# Altium PCB MeasureMent.PcbDoc
Units mm, origin at the board's own origin, x right, y up, seen from the top; angles counter-clockwise.
Board outline 22.86 x 17.02 mm, 2 copper layers (Top Layer, Bottom Layer); 3 components, 6 nets, 25 pads, 3 vias.
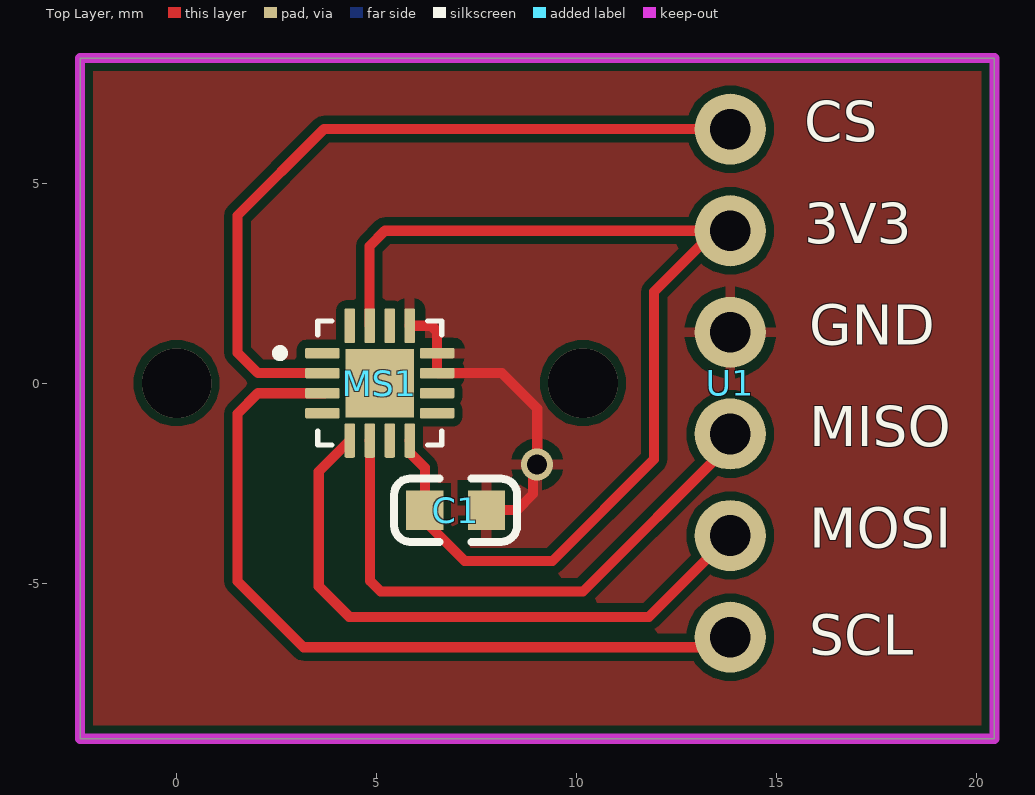
[diagram p0: Top Layer view]
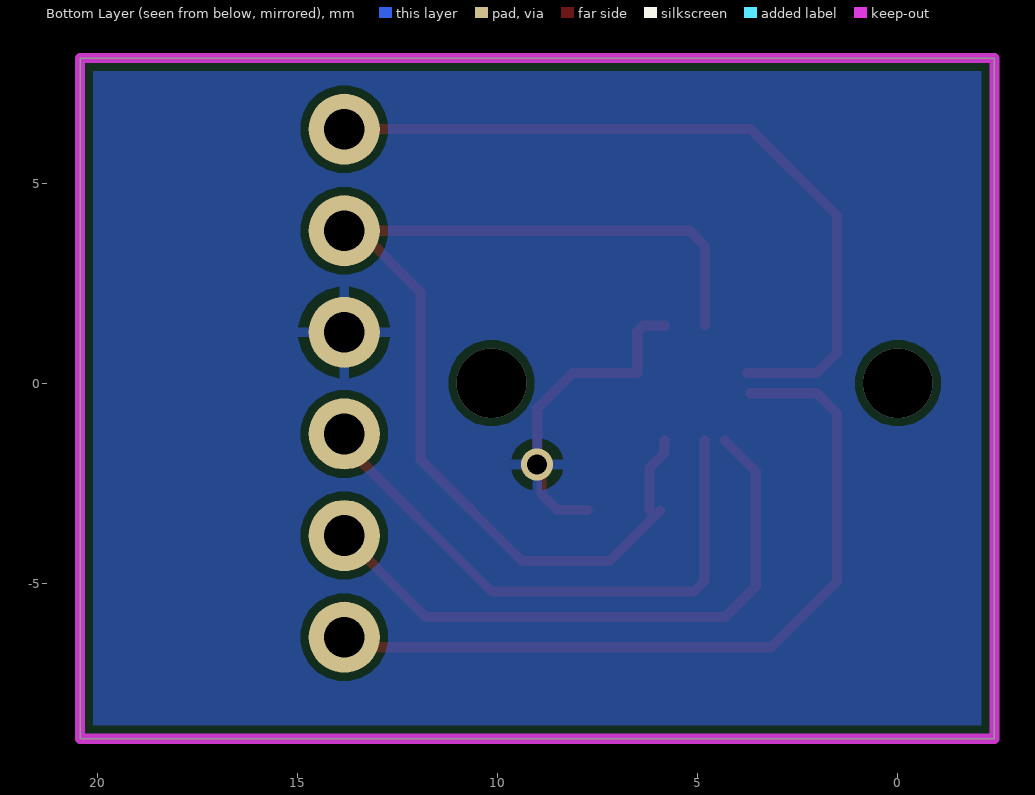
[diagram p1: Bottom Layer view, seen from below]

## Layer stack, top to bottom
Top Solder: solder mask 0.0102, Solder Resist, Dk 3.5
Top Layer: signal copper 0.0356
Dielectric 1: dielectric 0.32, FR-4, Dk 4.8
Bottom Layer: signal copper 0.0356
Bottom Solder: solder mask 0.0102, Solder Resist, Dk 3.5

## Board outline
-2.413,-8.89 20.447,-8.89 20.447,8.128 -2.413,8.128

## Design rules (kind name [scope] priority, off if disabled: settings)
Clearance [All] p1: gap=0.2 ignorepadtopadclearanceinfootprint=FALSE
PolygonConnect [All] p1: connectstyle=Relief reliefconductorwidth=0.254 reliefentries=4 polygonreliefangle="90 Angle" airgapwidth=0.254
RoutingVias [All] p1: holewidth=0.711 width=1.27 viastyle="Through Hole" minholewidth=0.711 minwidth=1.27 maxholewidth=0.711 maxwidth=1.27
SolderMaskExpansion [All] p1: expansion=0.102 istentingtop=FALSE
Width [All] p1: maxlimit=0.254 minlimit=0.254 preferedwidth=0.254
30 further rules are at their usual default settings.

## Components (designator, comment, footprint, x,y, rotation, side; value= is the part's Value field where it differs from the comment)
C1 "0.1uF" 0603_C 6.977,-3.175 r180 top
MS1 "MLX90393SLW ABA 011 RE" VQFN-16_EP_3.0x3.0xo.5P 5.08,0 r0 top
U1 "CONNECTER" CONNECTOR 13.716,0 r0 top

## Footprints (in the part's own frame and the unit in brackets; to place one, negate y for a bottom-side part, rotate by r counter-clockwise, add the part's x,y. Pads: shape width x height; smd on the part's side, far side on the other; paste and mask are expansions set on the pad)
0603_C [mm]
  rect 0.93x0.98 smd: 1(-0.77,0) 2(0.77,0)
  silkscreen extent -1.53,-0.79 1.54,0.79, body extent -0.8,-0.4 0.8,0.4, height 0.3
CONNECTOR [mil]
  round 70 hole 40: 1(5,250) 2(5,150) 3(5,50) 4(5,-50) 5(5,-150) 6(5,-250)
VQFN-16_EP_3.0x3.0xo.5P [mm]
  rrect25% 0.86x0.26 smd: 1(-1.435,0.75) 2(-1.435,0.25) 3(-1.435,-0.25) 4(-1.435,-0.75) 9(1.435,-0.75) 10(1.435,-0.25) 11(1.435,0.25) 12(1.435,0.75)
  rrect25% 0.26x0.86 smd: 5(-0.75,-1.435) 6(-0.25,-1.435) 7(0.25,-1.435) 8(0.75,-1.435) 13(0.75,1.435) 14(0.25,1.435) 15(-0.25,1.435) 16(-0.75,1.435)
  rect 1.71x1.71 smd paste-2: 17(0,0)
  silkscreen extent -2.59,-1.55 1.55,1.55, body extent -1.55,-1.55 1.55,1.55, height 1

## Part data
C1: library part CAP_0.1uF, "capacitance"
MS1: "sensor"

## Via types
v1: diameter 1.74, hole 1.74, Top Layer to Bottom Layer, 2 vias
v2: diameter 0.8, hole 0.5, Top Layer to Bottom Layer, 1 vias

## Nets (pads, with @x,y where several pads share a name; then routed paths per layer and width w, separated by ;. In a path a pad name is that pad's centre, name@x,y a point inside that pad or via, vN(x,y) a via of type N, cw(c..) or ccw(c..) an arc to the next point about the centre after c; other vN are vias at no path point)
3V3: C1.2 MS1.8 MS1.15 U1.2 | length 27
  Top Layer w0.254: MS1.15@4.827,1.449 4.827,1.799 4.826,1.8 4.826,3.429 5.207,3.81 U1.2@13.462,3.81 ; MS1.8 5.833,-1.438 5.833,-1.738 6.207,-2.112 C1.2 ; C1.2@5.944,-3.183 7.206,-4.445 9.398,-4.445 11.938,-1.905 11.938,2.286 U1.2@13.462,3.81 ; U1.2 U1.2@13.462,3.81
CS: MS1.2 U1.1 | length 19.1
  Top Layer w0.254: MS1.2@3.766,0.253 3.281,0.253 3.28,0.254 2.032,0.254 1.524,0.762 1.524,4.191 3.683,6.35 U1.1
GND: C1.1 MS1.11 MS1.12 MS1.13 U1.3 | length 8.6
  Top Layer w0.254: MS1.13 6.366,1.435 6.515,1.286 MS1.12 MS1.11 7.47,0.25 7.474,0.254 8.128,0.254 9.017,-0.635 v2(9.017,-2.032) 8.913,-2.136 8.913,-2.771 8.509,-3.175 C1.1 ; U1.3@13.431,1.016 U1.3@13.843,1.016
MISO: MS1.6 U1.4 | length 14.2
  Top Layer w0.254: MS1.6 4.833,-1.438 4.833,-4.938 4.867,-4.972 5.102,-5.207 10.16,-5.207 U1.4@13.843,-1.524
MOSI: MS1.5 U1.5 | length 15.4
  Top Layer w0.254: MS1.5 3.556,-2.209 3.556,-5.08 4.318,-5.842 11.811,-5.842 U1.5
SCL: MS1.3 U1.6 | length 19.6
  Top Layer w0.254: MS1.3@3.698,-0.253 3.281,-0.253 3.28,-0.254 2.032,-0.254 1.524,-0.762 1.524,-4.953 3.175,-6.604 U1.6@13.843,-6.604
pads on no net: MS1.1 MS1.4 MS1.7 MS1.9 MS1.10 MS1.14 MS1.16 MS1.17
copper on no net:
  other v1: 0,0 10.16,0

## Polygon pours and split planes (outlines as drawn)
GND on Top Layer "GND_L01_P002" (solid, remove dead copper, pour order 2): -2.413,-8.89 20.447,-8.89 20.447,8.128 -2.413,8.128
GND on Bottom Layer "GND_L02_P003" (solid, remove dead copper, pour order 3): -2.413,-8.89 20.447,-8.89 20.447,8.128 -2.413,8.128

## Keep-outs
Keep-Out Layer:
  the board outline again, w0.254

## Silkscreen, mask and mechanical layers (free items; w line width, h text height)
Top Overlay:
  text "CS" at 15.694,6.042 h1
  text "3V3" at 15.694,3.502 h1
  text "GND" at 15.821,0.962 h1
  text "MISO" at 15.821,-1.578 h1
  text "MOSI" at 15.821,-4.118 h1
  text "SCL" at 15.821,-6.785 h1